# Altium PCB PCB1.PcbDoc
Units mm, origin at the board's own origin, x right, y up, seen from the top; angles counter-clockwise.
Board outline 65 x 35.3 mm, 2 copper layers (Top Layer, Bottom Layer); 32 components, 28 nets, 115 pads, 192 vias.
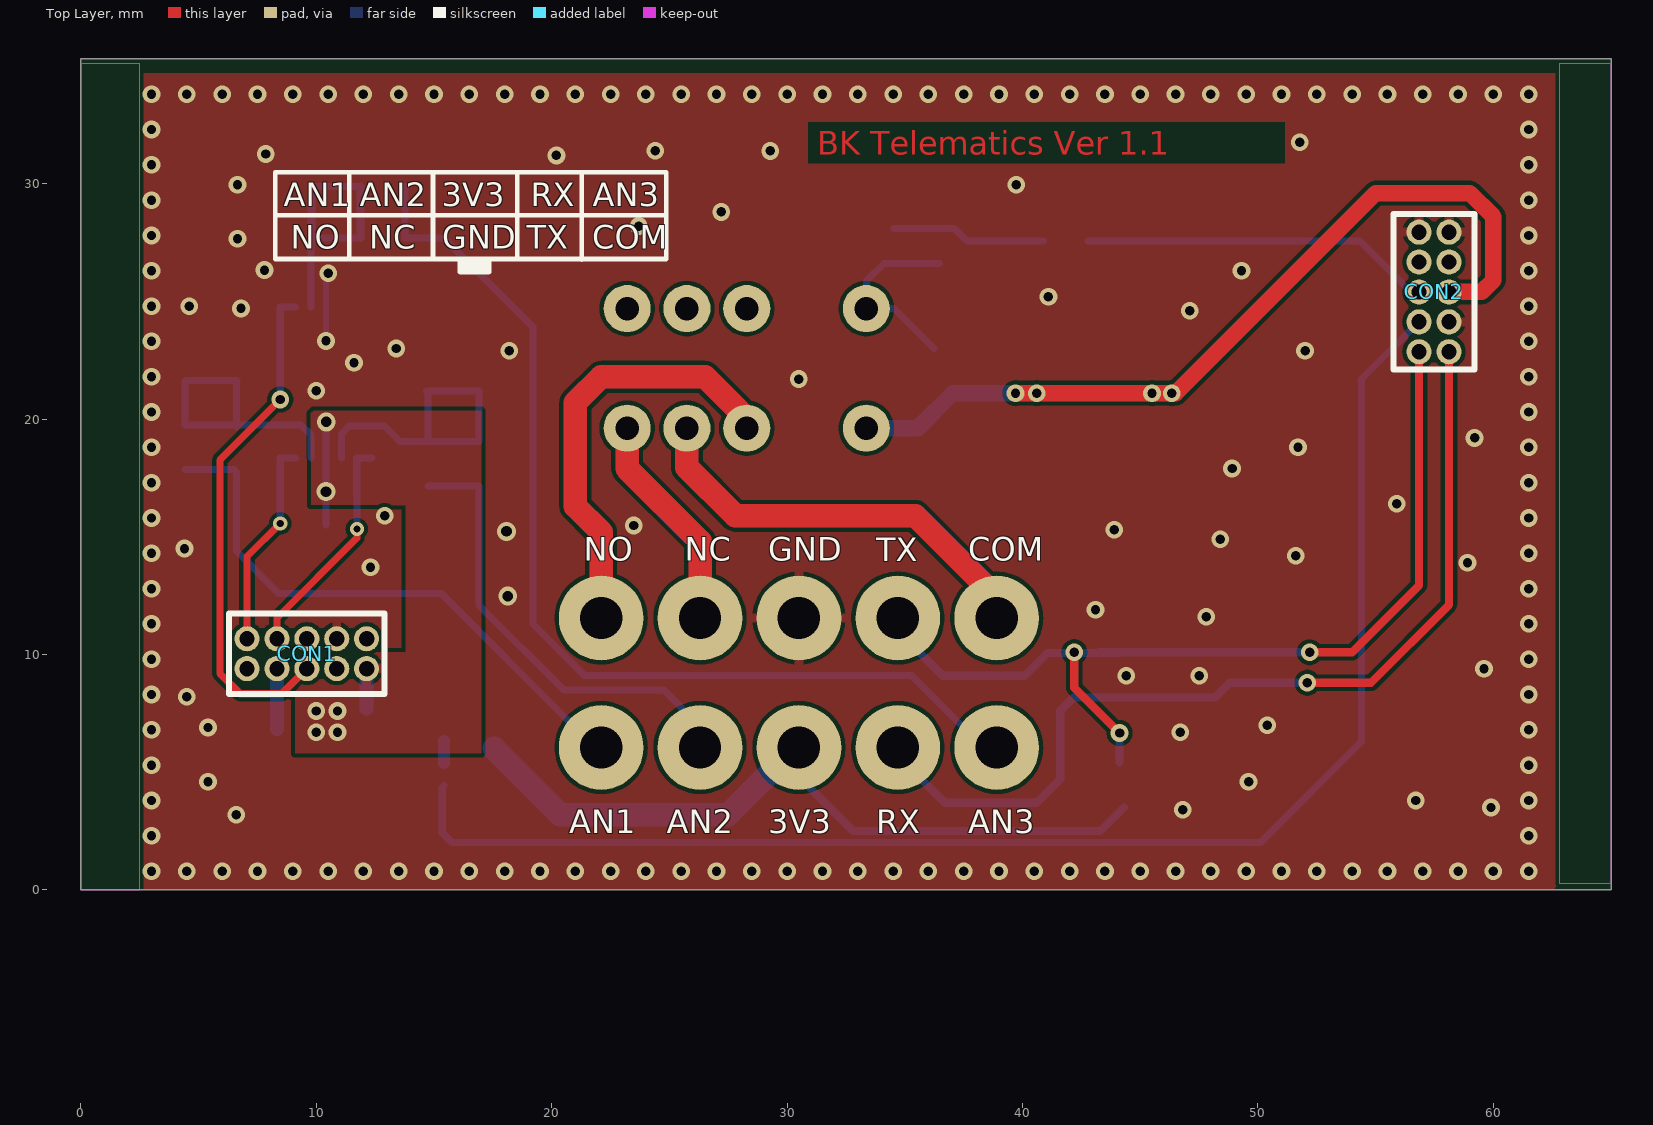
[diagram p0: Top Layer view]
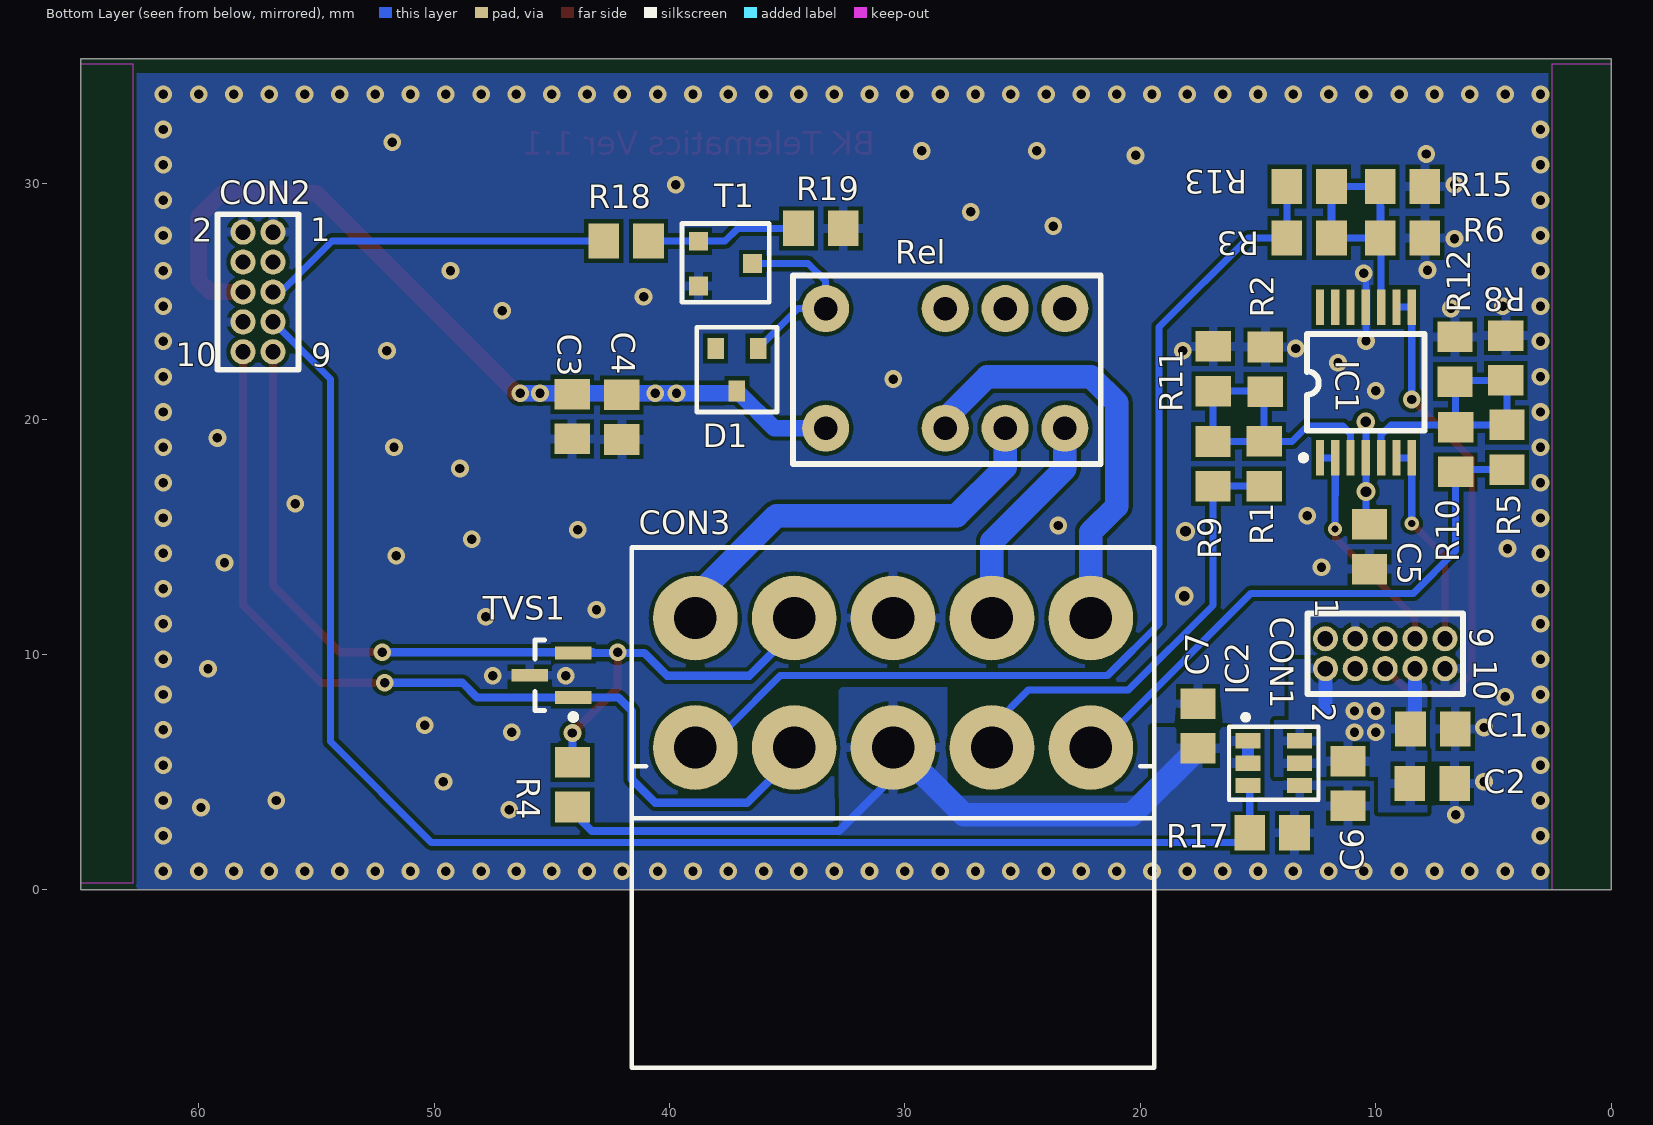
[diagram p1: Bottom Layer view, seen from below]

## Layer stack, top to bottom
Top Layer: signal copper 0.0356
Dielectric: dielectric 0.32, FR-4, Dk 4.8
Bottom Layer: signal copper 0.0356

## Board outline
0,0 65,0 65,35.3 0,35.3

## Design rules (kind name [scope] priority, off if disabled: settings)
Clearance Polygons [InPolygon] p1: gap=0.17
Clearance [All] p2: gap=0.17
HoleSize [All] p1: absolutevalues=TRUE maxlimit=3 minlimit=0.3 maxpercent=80.000 minpercent=20.000
MinimumAnnularRing [All] p1: minimumring=0.15
MinimumSolderMaskSliver [All] p1 off: minsoldermaskwidth=0.254
PolygonConnect PolygonConnect_1 [IsVia] p1: connectstyle=Direct reliefconductorwidth=0.254 reliefentries=4 polygonreliefangle="90 Angle"
PolygonConnect [All] p2: connectstyle=Relief reliefconductorwidth=0.4 reliefentries=4 polygonreliefangle="90 Angle"
RoutingVias [All] p1: holewidth=0.3 width=0.6 viastyle="Through Hole" minholewidth=0.3 minwidth=0.6 maxholewidth=1 maxwidth=3
SilkToSilkClearance [All] p1: silktosilkclearance=0.01
SilkscreenOverComponentPads [All] p1 off: minsilkscreentomaskgap=0.254
SolderMaskExpansion [All] p1: expansion=0.102
TestPointUsage [All] p1: valid=0 allowmultiple=FALSE
Testpoint [All] p1: side=15 testpointundercomponent=TRUE minsize=1.016 maxsize=2.54 preferedsize=1.524 minholesize=0 maxholesize=1.016 preferedholesize=0.813 testpointgrid=0.025 style=1023 order=0123456789
Width [All] p1: maxlimit=10 minlimit=0.15 preferedwidth=0.254
20 further rules are at their usual default settings.

## Components (designator, comment, footprint, x,y, rotation, side; value= is the part's Value field where it differs from the comment)
C1 "Cap1" 2012[0805] 7.569,6.833 r0 bottom
C2 "Cap1" 2012[0805] 7.595,4.521 r0 bottom
C3 "Cap1" 2012[0805] 44.131,20.107 r90 bottom
C4 "Cap1" 2012[0805] 42.023,20.081 r90 bottom
C5 "Cap1" 2012[0805] 10.262,14.58 r90 bottom
C6 "Cap1" 2012[0805] 11.176,4.521 r90 bottom
C7 "Cap1" 2012[0805] 17.551,6.96 r270 bottom
CON1 "Header 5X2" "Header 2x5,1.27mm" 9.596,10.033 r270 top locked
CON2 "Header 5X2" "Header 2x5,1.27mm" 57.476,25.4 r0 top locked
CON3 "Molex Connector 10 pins 39301100" "molex 003930-1100" 30.5,5.148 r180 bottom locked
D1 "PMEG2005ET" PMEG2005ET 37.135,22.098 r0 bottom
IC1 "ADA4096-4" ADA4096-4 8.467,18.355 r90 bottom
IC2 "SIP32508DT-T1-GE3" SOT23-6 14.327,5.383 r270 bottom
R1 "Res Semi" 2012[0805] 14.739,18.101 r270 bottom
R2 "Res Semi" 2012[0805] 14.688,22.114 r270 bottom
R3 "Res Semi" 2012[0805] 12.825,27.695 r0 bottom
R4 "Res Semi" 2012[0805] 44.12,4.47 r90 bottom
R5 "Res Semi" 2012[0805] 4.42,18.801 r270 bottom
R6 "Res Semi" 2012[0805] 8.863,27.695 r0 bottom
R8 "Res Semi" 2012[0805] 4.471,22.594 r270 bottom
R9 "Res Semi" 2012[0805] 16.911,18.096 r270 bottom
R10 "Res Semi" 2012[0805] 6.605,18.708 r270 bottom
R11 "Res Semi" 2012[0805] 16.898,22.139 r270 bottom
R12 "Res Semi" 2012[0805] 6.63,22.543 r270 bottom
R13 "Res Semi" 2012[0805] 12.825,29.879 r0 bottom
R15 "Res Semi" 2012[0805] 8.863,29.879 r0 bottom
R17 "Res Semi" 2012[0805] 14.4,2.429 r0 bottom
R18 "Res Semi" 2012[0805] 41.84,27.567 r0 bottom
R19 "Res Semi" 2012[0805] 33.566,28.1 r0 bottom
Rel "TX2-4.5V" "Tx4.5 Relay" 33.363,22.157 r180 bottom
T1 "MMBT6427" MMBT6427 37.619,26.608 r270 bottom
TVS1 "GSOT03C-GS08" SOT95P245X110-3N 45.009,9.119 r0 bottom

## Footprints (in the part's own frame and the unit in brackets; to place one, negate y for a bottom-side part, rotate by r counter-clockwise, add the part's x,y. Pads: shape width x height; smd on the part's side, far side on the other; paste and mask are expansions set on the pad)
2012[0805] [mm] "Chip Resistor; Body 2.0 x 1.3 mm (LxW typ)"
  rect 1.3x1.5 smd: 1(-0.95,0) 2(0.95,0)
ADA4096-4 [mm]
  rect 1.5x0.35 smd: 1(0,3.9) 2(0,3.25) 3(0,2.6) 4(0,1.95) 5(0,1.3) 6(0,0.65) 7(0,0) 8(6.4,0) 9(6.4,0.65) 10(6.4,1.3) 11(6.4,1.95) 12(6.4,2.6) 13(6.4,3.25) 14(6.4,3.9)
  silkscreen extent -0.11,-0.55 5.25,4.71, body extent 1.15,-0.55 5.3,4.45, height 1.05
"Header 2x5,1.27mm" [mil] "1.27mm THROUGH-HOLE  MICRO  BOARD  STACKER"
  round 42 hole 25.59: 1(-25,100) 2(25,100) 3(-25,50) 4(25,50) 5(-25,0) 6(25,0) 7(-25,-50) 8(25,-50) 9(-25,-100) 10(25,-100)
  silkscreen extent -67,-130 68,130, body extent -69,-130 67,130
MMBT6427 [mm]
  rect 0.8x0.8 smd: B(-0.95,-1.145) C(0,1.145) E(0.95,-1.145)
  silkscreen extent -1.7,-1.85 1.65,1.86
"molex 003930-1100" [mm]
  round 3.6 hole 1.8: 1(-8.4,6.4) 2(-4.2,6.4) 3(0,6.4) 4(4.2,6.4) 5(8.4,6.4) 6(8.4,0.9) 7(4.2,0.9) 8(0,0.9) 9(-4.2,0.9) 10(-8.4,0.9)
  round 0 all layers, no hole: 15(-8.4,-6.4) 16(8.4,-6.4)
  silkscreen extent -11.1,-12.7 11.1,9.4
PMEG2005ET [mm]
  rect 0.7x0.9 smd: 1(-0.9,-0.9) 2(0.9,-0.9) 3(0,0.9)
  silkscreen extent -1.7,-1.8 1.7,1.8
SOT23-6 [mm]
  rect 0.65x1.06 smd: 1(-0.95,-1.1) 2(0,-1.1) 3(0.95,-1.1) 4(0.95,1.1) 5(0,1.1) 6(-0.95,1.1)
  silkscreen extent -2.05,-1.9 1.55,1.9
SOT95P245X110-3N [mm] "SOT23, 3-Leads, Body 3,0x2,6mm (max), Pitch 0,95mm, IPC Medium Density"
  rect 1.55x0.55 smd: 1(-0.925,0.95) 2(-0.925,-0.95) 3(0.925,0)
  silkscreen extent -1.05,-1.5 0.7,1.9, body extent -0.7,-1.5 0.7,1.5, height 1.1
"Tx4.5 Relay" [mm] "Panasonic TX4.5 Relay Land Pattern"
  round 2 hole 1 paste-1: 1(0,-2.54) 3(5.08,-2.54) 4(7.62,-2.54) 5(10.16,-2.54) 8(10.16,2.54) 10(5.08,2.54) 12(0,2.54)
  round 2 hole 1: 9(7.62,2.54)
  silkscreen extent -1.4,-4.06 11.68,3.94

## Part data
CON1 CON2: "Header, 5-Pin, Dual row,1.27mm"
IC1: "30 V, Micropower, Overvoltage Protection,  Rail-to-Rail Input/Output Amplifiers"
IC2: "VISHAY  SIP32508DT-T1-GE3  Power Load Switch, Slew Rate Controlled, High Side, Active High, 1 Output, 5.5V, TSOT-23-6"
R1 R2 R3 R4 R5 R6 R8 R9 R10 R11 R12 R13 R15 R17 R18 R19: "Semiconductor Resistor"
TVS1: "Two-Line ESD-Protection in SOT-23"

## Via types
v1: diameter 0.75, hole 0.4, Top Layer to Bottom Layer, tented both sides, 186 vias
v2: diameter 0.8, hole 0.45, Top Layer to Bottom Layer, tented both sides, 4 vias
v3: diameter 0.6, hole 0.3, Top Layer to Bottom Layer, tented both sides, 2 vias

## Nets (pads, with @x,y where several pads share a name; then routed paths per layer and width w, separated by ;. In a path a pad name is that pad's centre, name@x,y a point inside that pad or via, vN(x,y) a via of type N, cw(c..) or ccw(c..) an arc to the next point about the centre after c; other vN are vias at no path point)
3V3: C1.2 C2.2 C5.2 C6.2 CON1.2 CON1.8 IC1.4 IC2.5 IC2.6 | length 8.6
  Bottom Layer w0.3: C5.2@10.417,15.5 v2@10.417,19.88
  Bottom Layer w0.6: C1.2@8.326,6.833 CON1.8 ; 12.136,7.7 CON1.2
  other v1: 10,6.7 10.9,6.7 10,7.6 10.9,7.6
  other v2: 10.41,16.92 10.42,19.88
3V3_OUT: C7.2 CON3.8 IC2.1 IC2.2 R4.1 | length 34.4
  Bottom Layer w0.35: CON3.8@30.5,6.948 30.5,4.8 32.8,2.5 43.3,2.5 R4.1@44.3,3.5
  Bottom Layer w0.5: IC2.2 15.427,5.9 IC2.1
  Bottom Layer w1: C7.2 20.361,3.2 27.5,3.2 30.5,6.2 CON3.8@30.5,6.948
AD1/PA18: CON1.9 IC1.6 IC1.7 | length 8.9
  Top Layer w0.3: CON1.9 7.056,14.156 v3(8.467,15.567)
  Bottom Layer w0.3: v3(8.467,15.567) IC1.7 IC1.6
AD2/PA19: CON1.7 IC1.1 IC1.2 | length 9.7
  Top Layer w0.3: CON1.7 8.326,11.556 11.72,14.95 v3(11.72,15.33)
  Bottom Layer w0.3: v3(11.72,15.33) 11.72,16.767 11.717,16.77 IC1.2 IC1.1
AD3/PA20: CON1.6 IC1.8 IC1.9 | length 21.8
  Top Layer w0.3: v1(8.467,20.833) 5.9,18.265 5.9,9.2 6.767,8.333 8.531,8.333 CON1.6
  Bottom Layer w0.3: v1(8.467,20.833) IC1.8 IC1.9
ANALOG1: CON3.6 R5.2 R10.2 | length 24.2
  Bottom Layer w0.3: R5.2 6.511,17.851 R10.2 6.605,14.395 8.4,12.6 15.3,12.6 20.952,6.948 CON3.6@22.1,6.948
ANALOG2: CON3.7 R1.2 R9.2 | length 18.7
  Bottom Layer w0.3: R1.2 16.907,17.151 R9.2 16.911,12.089 20.5,8.5 24.748,8.5 CON3.7@26.3,6.948
ANALOG3: CON3.10 R3.2 R13.2 | length 43.3
  Bottom Layer w0.3: R13.2 R3.2 15.415,27.695 19.2,23.91 19.2,11.3 21.4,9.1 35.3,9.1 37.452,6.948 CON3.10@38.9,6.948
COM1: Rel.9
COM2: CON3.1 Rel.4 | length 35.1
  Top Layer w1: Rel.4 25.743,17.947 27.8,15.89 35.44,15.89 38.9,12.43 CON3.1
  Bottom Layer w1: Rel.4 25.743,17.957 27.8,15.9 35.448,15.9 CON3.1@38.9,12.448
ERASE: CON1.1
EXT_PWR: CON2.4
GND: C1.1 C2.1 C3.1 C4.1 C5.1 C6.1 C7.1 CON1.3 CON1.10 CON2.1 CON2.2 CON2.8 CON3.3 IC1.11 IC2.4 R2.1 R6.1 R8.1 R11.1 R12.1 R15.1 R17.1 R19.1 T1.E TVS1.3 | length 3.1
  Bottom Layer w0.254: v1@10.417,23.31 v1@10.417,26.386
  other v1: 3,0.8 4.5,0.8 6,0.8 7.5,0.8 9,0.8 10.5,0.8 12,0.8 13.5,0.8 15,0.8 16.5,0.8 18,0.8 19.5,0.8 21,0.8 22.5,0.8 24,0.8 25.5,0.8 27,0.8 28.5,0.8 30,0.8 31.5,0.8 33,0.8 34.5,0.8 36,0.8 37.5,0.8 39,0.8 40.5,0.8 42,0.8 43.5,0.8 45,0.8 46.5,0.8 48,0.8 49.5,0.8 51,0.8 52.5,0.8 54,0.8 55.5,0.8 57,0.8 58.5,0.8 60,0.8 61.5,0.8 3,2.3 61.5,2.3 6.6,3.2 46.8,3.4 59.9,3.5 3,3.8 56.7,3.8 61.5,3.8 5.4,4.6 49.6,4.6 3,5.3 61.5,5.3 46.7,6.7 3,6.8 61.5,6.8 5.4,6.9 50.4,7 4.5,8.2 3,8.3 61.5,8.3 44.4,9.1 47.5,9.1 59.6,9.4 3,9.8 61.5,9.8 3,11.3 61.5,11.3 47.8,11.6 43.1,11.9 3,12.8 61.5,12.8 12.3,13.7 58.9,13.9 51.6,14.2 3,14.3 61.5,14.3 4.4,14.5 48.4,14.9 43.9,15.3 23.49,15.48 3,15.8 61.5,15.8 12.9,15.9 55.9,16.4 3,17.3 61.5,17.3 48.9,17.9 3,18.8 51.7,18.8 61.5,18.8 59.2,19.2 3,20.3 61.5,20.3 10,21.2 30.5,21.7 3,21.8 61.5,21.8 11.6,22.4 18.2,22.9 52,22.9 13.4,23 3,23.3 61.5,23.3 10.41,23.32 47.1,24.6 6.8,24.7 3,24.8 4.6,24.8 61.5,24.8 41.1,25.2 10.51,26.19 3,26.3 49.3,26.3 61.5,26.3 7.8,26.33 6.65,27.66 3,27.8 61.5,27.8 23.7,28.2 27.2,28.8 3,29.3 61.5,29.3 39.73,29.95 6.65,29.96 3,30.8 61.5,30.8 20.2,31.2 7.85,31.26 24.4,31.4 29.28,31.39 51.77,31.76 3,32.3 61.5,32.3 3,33.8 4.5,33.8 6,33.8 7.5,33.8 9,33.8 10.5,33.8 12,33.8 13.5,33.8 15,33.8 16.5,33.8 18,33.8 19.5,33.8 21,33.8 22.5,33.8 24,33.8 25.5,33.8 27,33.8 28.5,33.8 30,33.8 31.5,33.8 33,33.8 34.5,33.8 36,33.8 37.5,33.8 39,33.8 40.5,33.8 42,33.8 43.5,33.8 45,33.8 46.5,33.8 48,33.8 49.5,33.8 51,33.8 52.5,33.8 54,33.8 55.5,33.8 57,33.8 58.5,33.8 60,33.8 61.5,33.8
  other v2: 18.13,12.48 18.08,15.23
NC1: Rel.10
NC2: CON3.4 Rel.5 | length 17.8
  Top Layer w1: Rel.5 23.203,17.907 26.3,14.81 CON3.4
  Bottom Layer w1: Rel.5 23.203,17.897 26.3,14.8 CON3.4@26.3,12.448
NetD1_1: D1.1 Rel.12 T1.C | length 8.2
  Bottom Layer w0.3: D1.1 34.536,24.697 Rel.12 33.363,25.863 34.108,26.608 T1.C
NetIC1_3: IC1.3 R1.1 R2.2 R9.1 R11.2 | length 15.9
  Bottom Layer w0.3: IC1.3 11.067,19.367 11.4,19.7 12.9,19.7 13.549,19.051 R1.1 ; R2.2 14.688,21.189 R11.2 16.911,21.189 R9.1 ; R2.2@14.739,21.113 R1.1 ; R11.2@16.911,21.176 R9.1 ; R1.1 14.739,19.046 R9.1
NetIC1_5: IC1.5 R5.1 R8.2 R10.1 R12.2 | length 16.5
  Bottom Layer w0.3: R8.2@4.42,21.593 R5.1 ; R8.2 6.605,21.644 6.605,19.751 R5.1 ; R10.1 6.605,21.568 R12.2 ; IC1.5 9.767,19.333 9.349,19.751 R5.1
NetIC1_10: IC1.10 R3.1 R6.2 R13.1 R15.2 | length 15
  Bottom Layer w0.3: IC1.10 9.767,29.03 ; R6.2 R15.2 R13.1 R3.1 R6.2
  Bottom Layer w0.35: R3.1 R13.1
NetR18_1: R18.1 R19.2 T1.B | length 6.6
  Bottom Layer w0.3: R19.2 37.1,28.1 37.633,27.567 R18.1
NO1: Rel.8
NO2: CON3.5 Rel.3 | length 36.1
  Top Layer w1: CON3.5 22.1,15.2 21,16.3 21,20.7 22.1,21.8 26.51,21.8 28.283,20.027 Rel.3
  Bottom Layer w1: CON3.5@22.1,12.448 22.1,15.2 21,16.3 21,20.7 22.1,21.8 26.5,21.8 28.283,20.017 Rel.3
PA15: CON2.7 IC2.3 R17.2 | length 61.9
  Bottom Layer w0.3: IC2.3 15.35,4.356 R17.2 15.775,2.005 50.105,2.005 54.4,6.3 54.4,21.7 56.83,24.13 CON2.7
PA16: CON2.5 R18.2 | length 14.9
  Bottom Layer w0.3: R18.2 54.333,27.567 56.5,25.4 CON2.5
PA17/AD0: CON2.3
PB2/URXD1: CON2.10 CON3.9 TVS1.1 | length 41.5
  Top Layer w0.35: v1(52.1,8.8) 54.8,8.8 58.111,12.111 CON2.10
  Bottom Layer w0.3: CON3.9 CON3.9@34.7,6.948 ; v1(52.1,8.8) v1@52.2,8.8
  Bottom Layer w0.35: CON3.9 34.7,5.7 36.7,3.7 40.6,3.7 41.6,4.7 41.6,7.6 42.169,8.169 TVS1.1 48.169,8.169 48.8,8.8 v1(52.1,8.8)
PB3/UTXD1: CON2.9 CON3.2 R4.2 TVS1.2 | length 42.2
  Top Layer w0.35: v1(42.2,10.1) 42.2,8.586 v1(44.12,6.666) ; v1(52.194,10.094) 53.994,10.094 56.841,12.941 CON2.9
  Bottom Layer w0.35: CON3.2@34.7,12.448 CON3.2 34.7,11 36.6,9.1 40.1,9.1 41.069,10.069 TVS1.2 ; 43.246,10.094 v1(52.194,10.094) ; R4.2 v1(44.12,6.666)
VSYS: C3.2 C4.2 CON2.6 D1.3 Rel.1 | length 42.5
  Top Layer w0.7: v1(39.7,21.1) v1(45.5,21.1) v1(46.343,21.1) 46.5,21.1 55,29.6 59,29.6 60,28.6 60,25.9 59.5,25.4 CON2.6
  Bottom Layer w0.7: Rel.1 35.554,19.617 D1.3@37.037,21.1 ; D1.3@37.135,21.1 42.023,21.1 v1(45.5,21.1) v1(46.343,21.1)
  other v1: 40.6,21.1
pads on no net: CON1.4 CON1.5 CON3.15 CON3.16 D1.2 IC1.12 IC1.13 IC1.14

## Polygon pours and split planes (outlines as drawn)
3V3 on Top Layer "NET" (solid, remove dead copper, pour order 1004): 9.1,5.8 17,5.8 17,20.36 9.764,20.36 9.775,16.356 13.8,16.347 13.8,10.1 9.1,10.1
GND on Top Layer "NET" (solid, remove dead copper, pour order 1005): 0,0 65,0 65,34.7 0,34.7
3V3_OUT on Bottom Layer "NET" (solid, pour order 1002): 14.9,2.2 32.795,2.2 32.8,8.6 28.2,8.6 28.2,4 19.5,4 19.5,6.9 14.9,6.9
3V3 on Bottom Layer "NET" (solid, pour order 1001): 7.8,9.8 13.7,9.8 13.7,7.2 14.3,7.2 14.3,4.8 9.9,4.8 9.9,3.3 7.8,3.3
GND on Bottom Layer "NET" (solid, remove dead copper, pour order 1003): 0,0 65,0 65,34.7 0,34.7

## Keep-outs
Keep-Out Layer:
  rectangle: 0,0 2.5,35.1
  rectangle: 62.8,0.279 65,35.1

## Other copper
Top Layer:
  text "BK Telematics Ver 1.1" at 31.27,31.23 h1

## Silkscreen, mask and mechanical layers (free items; w line width, h text height)
Top Overlay:
  rectangle: 16.15,26.32 17.29,26.81
  lines w0.2: 8.29,28.66 24.87,28.66 24.87,26.8 8.26,26.8 8.26,30.48 24.87,30.48 24.87,28.62 ; 11.4,26.8 11.4,30.48 ; 14.96,26.79 14.96,30.47 ; 18.54,26.8 18.54,30.48 ; 21.28,26.78 21.28,30.46
  lines w0.25: 16.13,26.73 16.13,26.26 17.31,26.26 17.31,26.74
  text "AN1" at 8.61,29.04 h1
  text "AN2" at 11.85,29.04 h1
  text "3V3" at 15.33,29.04 h1
  text "RX" at 19.11,29.04 h1
  text "AN3" at 21.74,29.04 h1
  text "NO" at 8.91,27.23 h1
  text "NC" at 12.24,27.23 h1
  text "GND" at 15.35,27.23 h1
  text "TX" at 18.93,27.23 h1
  text "COM" at 21.73,27.23 h1
  text "NO" at 21.36,13.98 h1
  text "NC" at 25.66,13.98 h1
  text "GND" at 29.2,13.98 h1
  text "TX" at 33.78,13.97 h1
  text "COM" at 37.69,13.98 h1
  text "AN1" at 20.75,2.41 h1
  text "AN2" at 24.89,2.41 h1
  text "3V3" at 29.2,2.41 h1
  text "RX" at 33.78,2.41 h1
  text "AN3" at 37.69,2.41 h1
Bottom Overlay:
  lines w0.25: 6.296,8.318 12.898,8.318 12.898,8.332 12.9,8.332 12.9,11.747 6.296,11.747 6.296,8.318 ; 55.761,22.1 55.776,22.1 55.776,22.098 59.19,22.098 59.19,28.702 55.761,28.702 55.761,22.1
Mechanical 1:
  lines w0.508: 0,0 0,35.1 65,35.1 65,0 0,0

## Dimensions
0,35.1 to 0,0 on Mechanical 1
0,35.1 to 65,35.1 on Mechanical 1

## Text inside footprints (layer, text, board x,y; h text height)
CON1: Bottom Overlay "2" at 12.69,7.95 h1 r90; Bottom Overlay "1" at 12.57,12.41 h1 r90; Bottom Overlay "9" at 6,11.13 h1 r90; Bottom Overlay "10" at 5.84,9.77 h1 r90
CON2: Bottom Overlay "2" at 60.28,27.54 h1; Bottom Overlay "10" at 60.97,22.24 h1; Bottom Overlay "9" at 55.21,22.23 h1; Bottom Overlay "1" at 55.25,27.55 h1